# Allegro board PT8618.brd
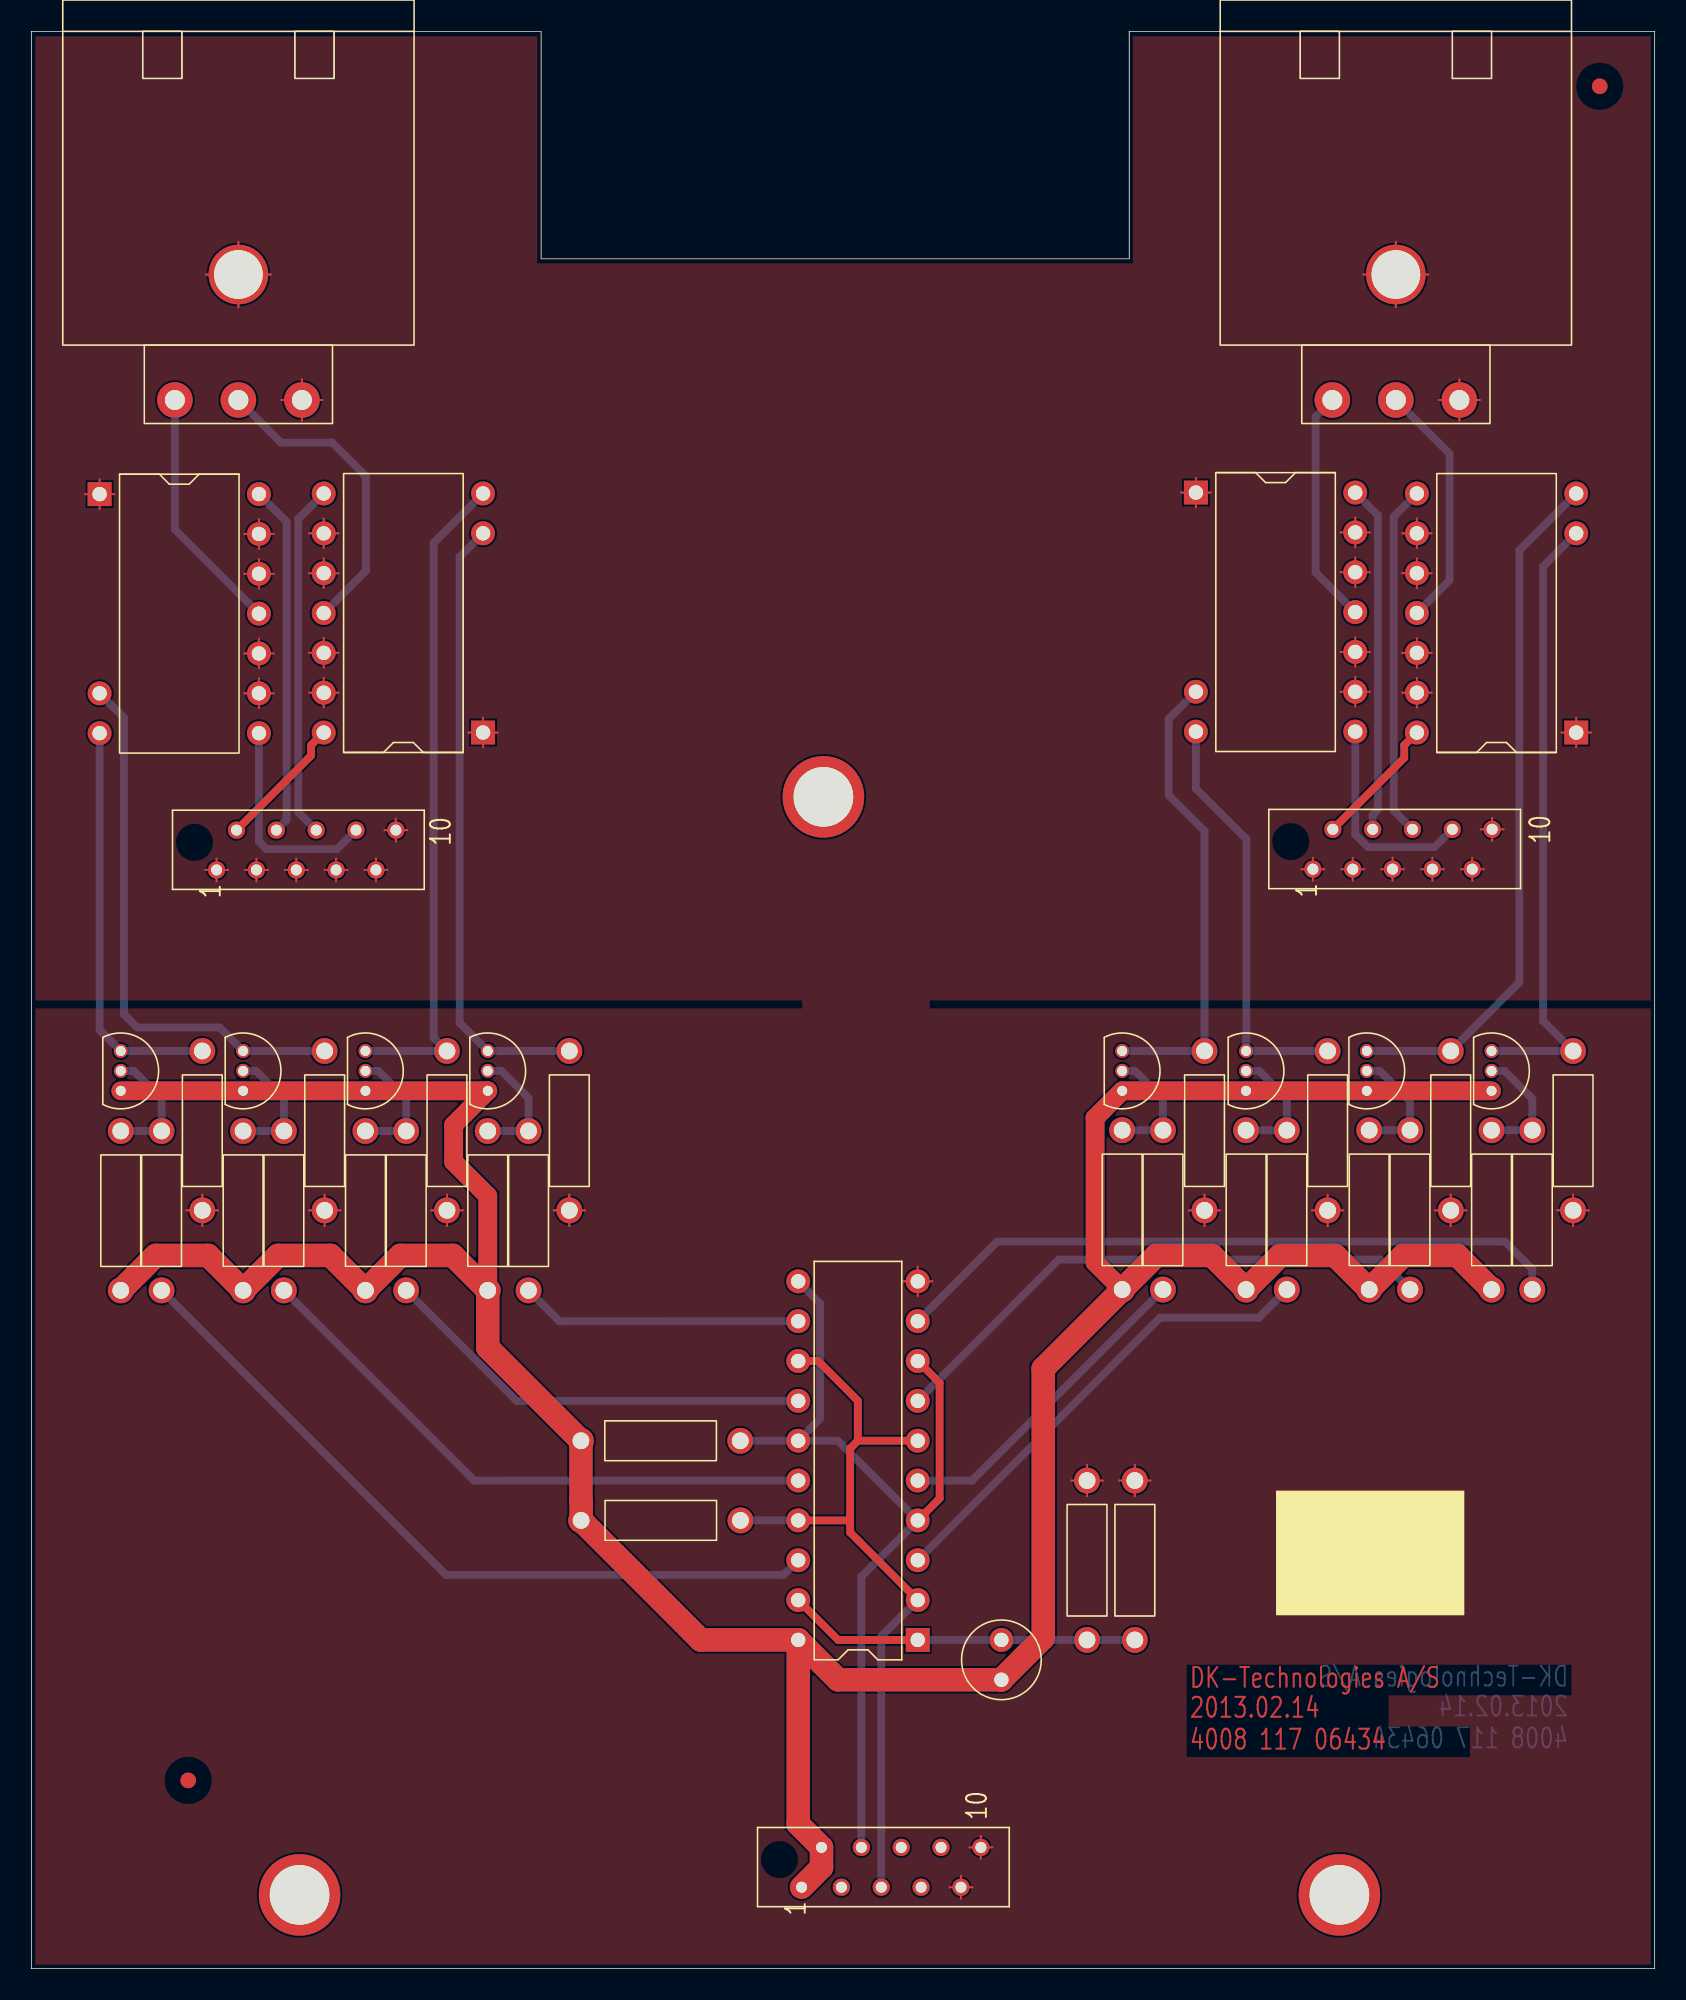
[diagram p0: board, top side]
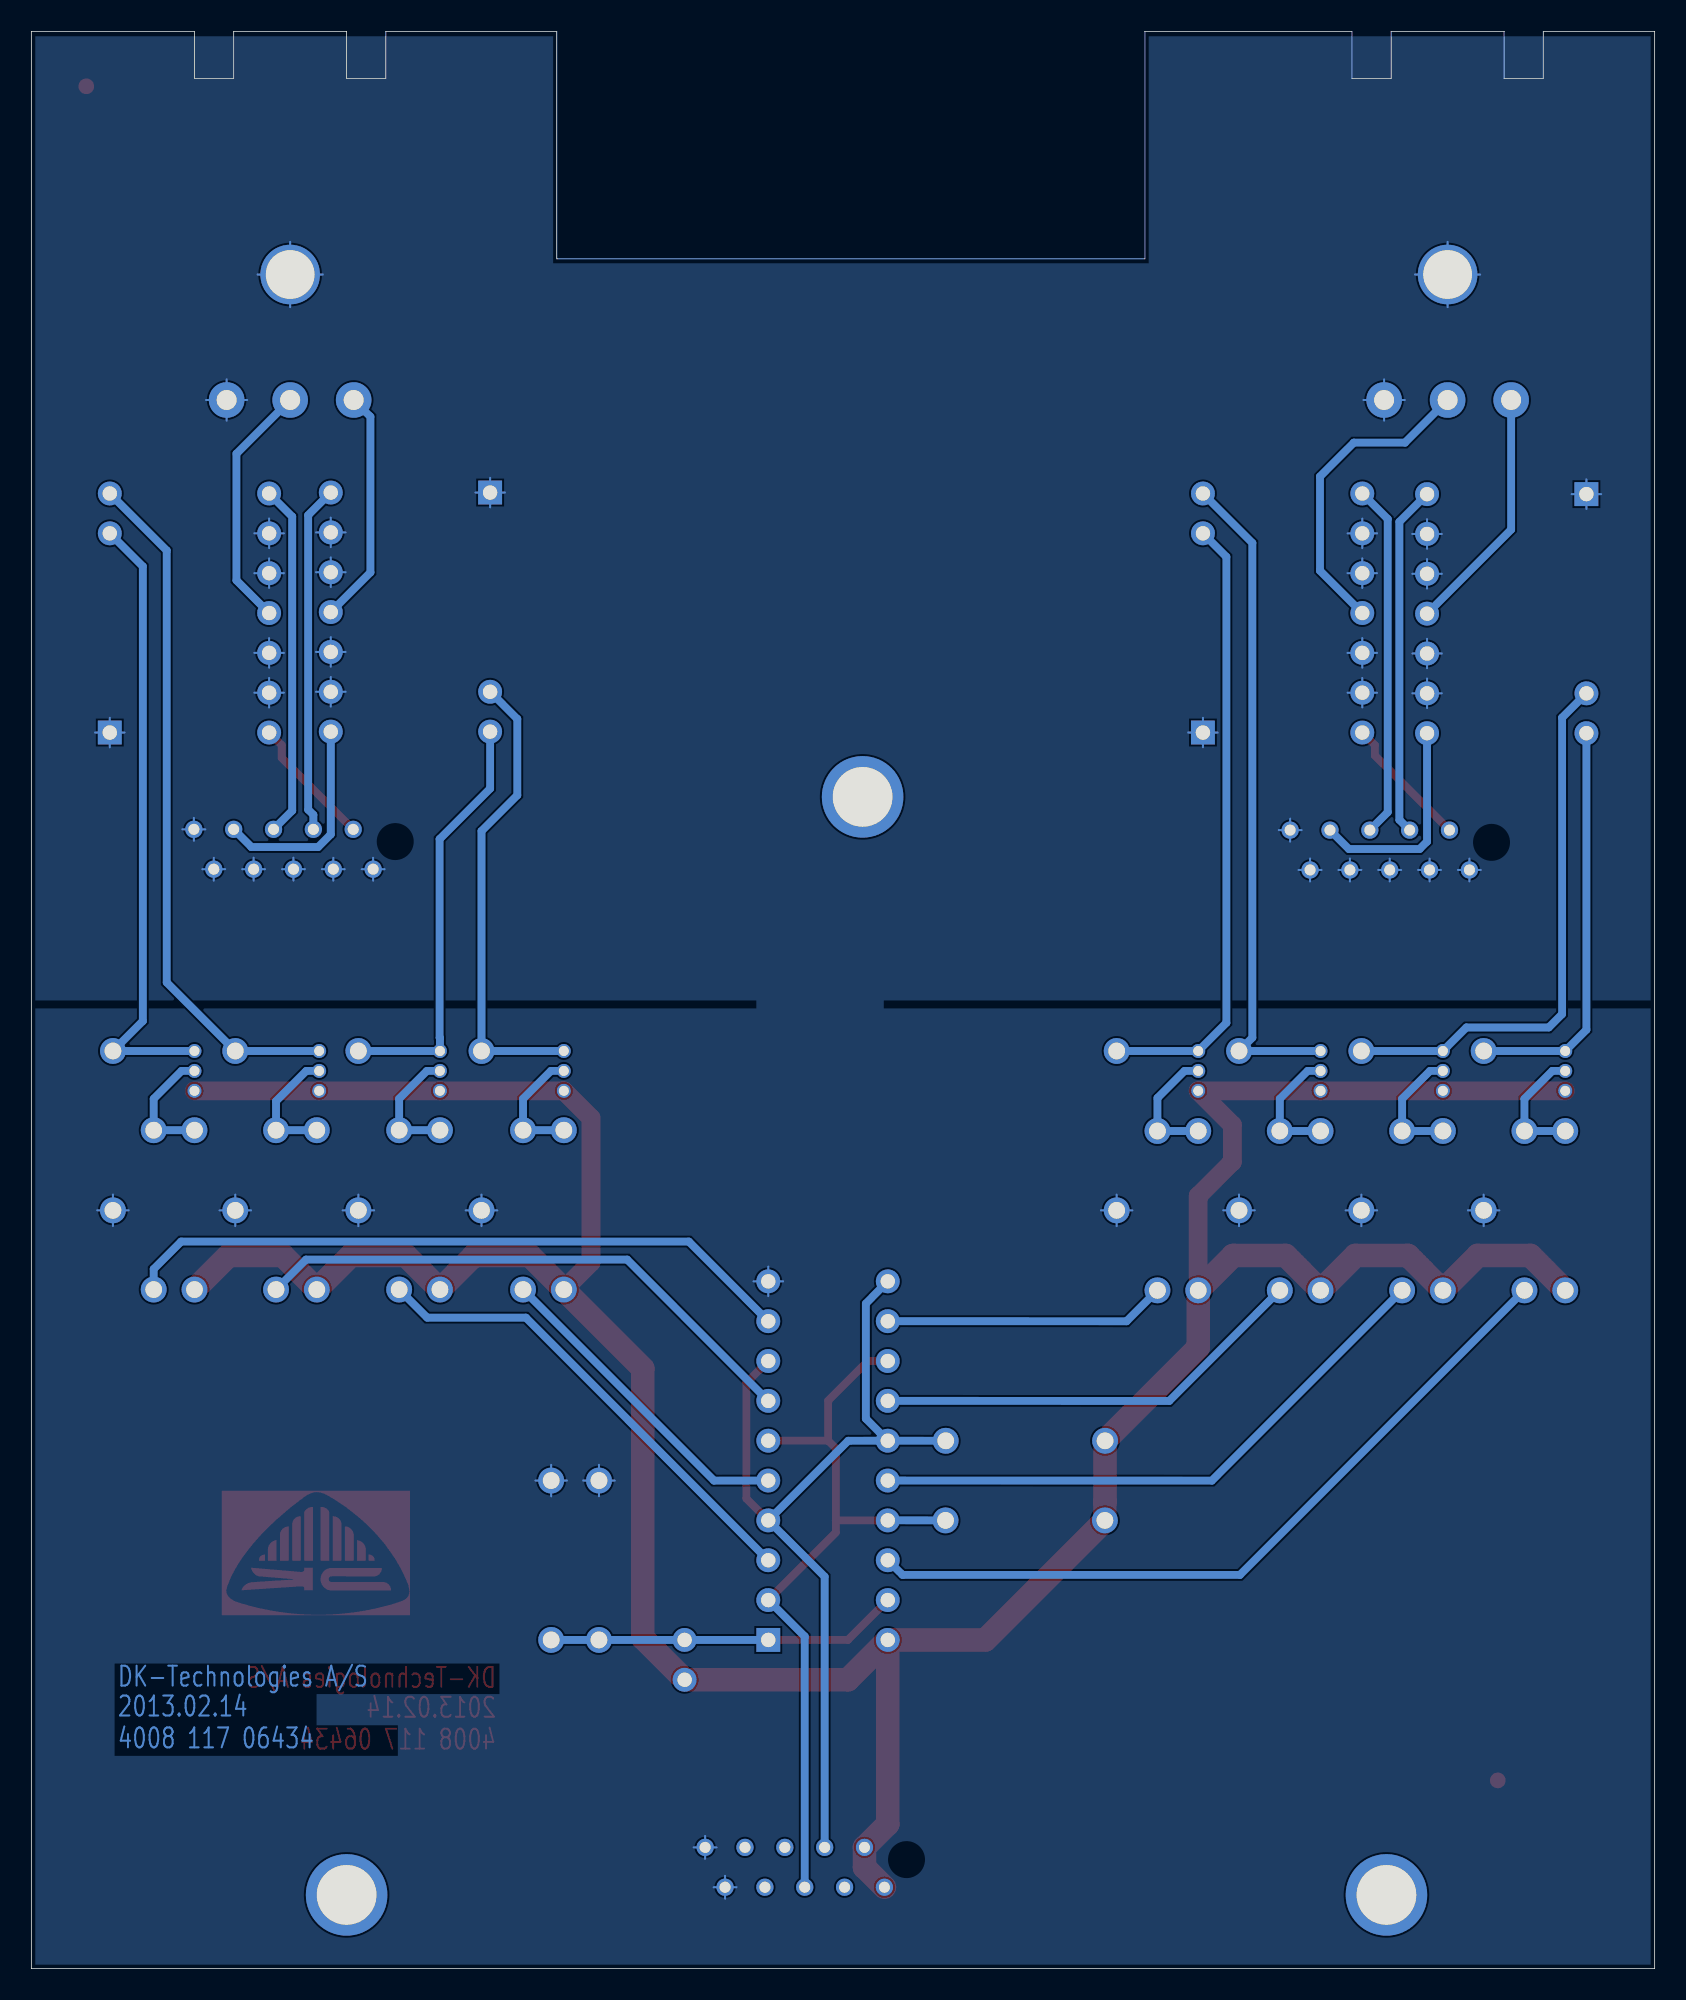
[diagram p1: board, bottom side, seen from below]

Outline 103.5 x 123.5 mm; copper layers: TOP, BOTTOM. Coordinates in mm from the lower left corner of the outline.
Outline path: 0,123.5 7.1,123.5 7.1,120.5 9.6,120.5 9.6,123.5 16.8,123.5 16.8,120.5 19.3,120.5 19.3,123.5 32.5,123.5 32.5,109 70,109 70,123.5 80.9,123.5 80.9,120.5 83.4,120.5 83.4,123.5 90.6,123.5 90.6,120.5 93.1,120.5 93.1,123.5 103.5,123.5 103.5,0 0,0 0,123.5

## Placement (name value [footprint] x y rotation side)
C401  10u/16V  [CAP196]  61.85 18.41 0 top
D401  BAW62  [RES400]  10.9 58.5 180 top
D402  BAW62  [RES400]  18.7 58.5 180 top
D403  BAW62  [RES400]  26.5 58.5 180 top
D404  BAW62  [RES400]  34.3 58.5 180 top
D405  BAW62  [RES400]  90.5 58.5 180 top
D406  BAW62  [RES400]  98.3 58.5 180 top
D407  BAW62  [RES400]  82.65 58.5 180 top
D408  BAW62  [RES400]  74.8 58.5 180 top
D409  BAT81  [RES400]  67.31 20.95 0 top
NOREF  -  [unnamed]  83.4 4.7 0 top
NOREF#2  -  [unnamed]  50.5 74.7 0 top
NOREF#3  -  [unnamed#2]  10 12 0 top
NOREF#4  -  [unnamed#2]  100 120 0 top
NOREF#5  -  [unnamed]  17.1 4.7 0 top
Q401  BC327  [TO92]  5.7 58.5 0 top
Q402  BC327  [TO92]  13.5 58.5 0 top
Q403  BC327  [TO92]  21.3 58.5 0 top
Q404  BC327  [TO92]  29.1 58.5 0 top
Q405  BC327  [TO92]  85.15 58.5 0 top
Q406  BC327  [TO92]  93.1 58.5 0 top
Q407  BC327  [TO92]  77.45 58.5 0 top
Q408  BC327  [TO92]  69.55 58.5 0 top
R401  2K67  [RES400]  8.3 53.4 180 top
R402  1K0  [RES400]  5.7 53.4 180 top
R403  2K67  [RES400]  16.1 53.4 180 top
R404  1K0  [RES400]  13.5 53.4 180 top
R405  2K67  [RES400]  23.9 53.4 180 top
R406  1K0  [RES400]  21.3 53.4 180 top
R407  2K67  [RES400]  31.7 53.4 180 top
R408  1K0  [RES400]  29.1 53.4 180 top
R409  2K67  [RES400]  87.9 53.45 180 top
R410  1K0  [RES400]  85.3 53.45 180 top
R411  2K67  [RES400]  95.7 53.45 180 top
R412  1K0  [RES400]  93.1 53.45 180 top
R413  2K67  [RES400]  80.05 53.45 180 top
R414  1K0  [RES400]  77.45 53.45 180 top
R415  2K67  [RES400]  72.15 53.45 180 top
R416  1K0  [RES400]  69.55 53.45 180 top
R417  10K0  [RES400]  70.36 31.11 180 top
R418  10K0  [RES400]  45.2 33.65 90 top
R419  10K0  [RES400]  45.21 28.57 90 top
RE401  RK1-L2-SV  [DIP14_4-RELAY]  4.35 94 0 top
RE402  RK1-L2-SV  [DIP14_4-RELAY]  28.8 78.8 180 top
RE403  RK1-L2-SV  [DIP14_4-RELAY]  74.25 94.1 0 top
RE404  RK1-L2-SV  [DIP14_4-RELAY]  98.5 78.8 180 top
U401  SN74HC244N  [DIP20_3]  56.52 20.95 180 top
UNK#REF  -  [#2]  85.3 26.5 0 top
XA4  CON10  [CONN_MICROMATCH_10]  33.4 67.5 90 top
XB4  CON4  [CONN_XLM-3-32PCV]  13.2 100 270 top
XC4  CON10  [CONN_MICROMATCH_10]  103.3 67.55 90 top
XD4  CON4  [CONN_XLM-3-32PCV]  87 100 270 top
XE4  CON10  [CONN_MICROMATCH_10]  70.7 2.65 90 top

## Library data of the parts
C401 = CAPACITOR POL_0: Tolerance: ***; User Part Number: ***
D401-D409 = DIODE_0: Tolerance: ***; User Part Number: ***
Q401-Q408 = PNP_0
R401-R419 = R_0: Tolerance: ***; User Part Number: ***
RE401-RE404 = RELAY SPDT_5: Tolerance: ***; User Part Number: ***
U401 = 74LVT244: Tolerance: ***; User Part Number: ***
XA4 XC4 XE4 = CON10
XB4 XD4 = CON4

## Footprints (pads in the part's own frame, mm; a bottom-side part is the same pattern mirrored in y, then rotated)
CAP196
  round 1.524 hole 0.914: 1(0,0) 2(0,2.54)
CONN_MICROMATCH_10
  round 0 hole 1.95 unplated: (4.3,23)
  round 1.1 hole 0.7: 1(2.54,21.59) 2(5.08,20.32) 3(2.54,19.05) 4(5.08,17.78) 5(2.54,16.51) 6(5.08,15.24) 7(2.54,13.97) 8(5.08,12.7) 9(2.54,11.43) 10(5.08,10.16)
CONN_XLM-3-32PCV
  round 2.27 hole 1.27: 1(0,4.05) 2(0,-4.05) 3(0,0)
  round 3.8 hole 3.1: 4(-8,0)
DIP14_4-RELAY
  rect 1.524x1.524 hole 0.914: 1(0,0)
  round 1.524 hole 0.914: 6(0,-12.7) 7(0,-15.24) 8(10.16,-15.24) 9(10.16,-12.7) 10(10.16,-10.16) 11(10.16,-7.62) 12(10.16,-5.08) 13(10.16,-2.54) 14(10.16,0)
DIP20_3
  rect 1.524x1.524 hole 0.914: 1(0,0)
  round 1.524 hole 0.914: 2(0,-2.54) 3(0,-5.08) 4(0,-7.62) 5(0,-10.16) 6(0,-12.7) 7(0,-15.24) 8(0,-17.78) 9(0,-20.32) 10(0,-22.86) 11(7.62,-22.86) 12(7.62,-20.32) 13(7.62,-17.78) 14(7.62,-15.24) 15(7.62,-12.7) 16(7.62,-10.16) 17(7.62,-7.62) 18(7.62,-5.08) 19(7.62,-2.54) 20(7.62,0)
RES400
  round 1.651 hole 1.067: 1(0,0) 2(0,10.16)
TO92
  round 0.889 hole 0.635: 1(0,0) 2(0,-1.27) 3(0,-2.54)
unnamed
  round 5.2 hole 3.8: (0,0)
unnamed#2
  round 1 smd: (0,0)

## Nets
+5V: C401.1 Q401.3(EMITTER) Q402.3(EMITTER) Q403.3(EMITTER) Q404.3(EMITTER) Q405.3(EMITTER) Q406.3(EMITTER) Q407.3(EMITTER) Q408.3(EMITTER) R402.2 R404.2 R406.2 R408.2 R410.2 R412.2 R414.2 R416.2 R418.2 R419.2 U401.20(VCC) XE4.1 XE4.2
GND_SIGNAL: D401.2 D402.2 D403.2 D404.2 D405.2 D406.2 D407.2 D408.2 D409.2 R417.1 RE401.1(C) RE401.9(C9) RE401.10(C10) RE401.12(C12) RE401.13(C13) RE402.1(C) RE402.9(C9) RE402.10(C10) RE402.12(C12) RE402.13(C13) RE403.1(C) RE403.9(C9) RE403.10(C10) RE403.12(C12) RE403.13(C13) RE404.1(C) RE404.9(C9) RE404.10(C10) RE404.12(C12) RE404.13(C13) U401.10(GND) XA4.1 XA4.3 XA4.5 XA4.7 XA4.9 XA4.10 XB4.1 XB4.4 XC4.1 XC4.3 XC4.5 XC4.7 XC4.9 XC4.10 XD4.1 XD4.4 XE4.9 XE4.10
RESET_REL: R419.1 U401.2(I0) U401.6(I2) U401.13(I6) U401.17(I4) XE4.5
SET_REL: R418.1 U401.4(I1) U401.8(I3) U401.11(I7) U401.15(I5) XE4.4
N01245: C401.2 D409.1 R417.2 U401.1(O\E\1\) U401.19(O\E\2\)
N02897: Q401.2(BASE) R401.1 R402.1
N03054: D401.1 Q401.1(COLLECTOR) RE401.7(SET)
N03551: Q402.2(BASE) R403.1 R404.1
N03575: D402.1 Q402.1(COLLECTOR) RE401.6(RESET)
N04126: Q403.2(BASE) R405.1 R406.1
N04150: D403.1 Q403.1(COLLECTOR) RE402.7(SET)
N04216: Q404.2(BASE) R407.1 R408.1
N04256: D404.1 Q404.1(COLLECTOR) RE402.6(RESET)
N04568: Q405.2(BASE) R409.1 R410.1
N04592: D405.1 Q405.1(COLLECTOR) RE404.7(SET)
N04658: Q406.2(BASE) R411.1 R412.1
N04698: D406.1 Q406.1(COLLECTOR) RE404.6(RESET)
N05603: Q407.2(BASE) R413.1 R414.1
N05627: D407.1 Q407.1(COLLECTOR) RE403.7(SET)
N05693: Q408.2(BASE) R415.1 R416.1
N05733: D408.1 Q408.1(COLLECTOR) RE403.6(RESET)
N06021: R401.2 U401.18(O0)
N06033: R403.2 U401.16(O1)
N06051: R405.2 U401.14(O2)
N06063: R407.2 U401.12(O3)
N06202: R413.2 U401.3(O4)
N06214: R415.2 U401.5(O5)
N06252: R409.2 U401.7(O6)
N06264: R411.2 U401.9(O7)
N07388: RE401.11(COMMON) XB4.2
N08121: RE402.11(COMMON) XB4.3
N13215: RE402.14(NC) XA4.2
N13219: RE402.8(NO) XA4.6
N13231: RE401.14(NC) XA4.4
N13243: RE401.8(NO) XA4.8
N13688: RE404.8(NO) XC4.6
N14649: RE404.14(NC) XC4.2
N14657: RE403.14(NC) XC4.4
N14661: RE403.8(NO) XC4.8
N15236: RE403.11(COMMON) XD4.2
N15633: RE404.11(COMMON) XD4.3

Pads without a net: XE4 3 6 7 8

## Routing (per net, layer and track width the routed paths; a pad name or vN(x,y) marks a point on that pad's centre or on a via; arc(x,y) is an arc through that point)
+5V: length 226.6
  TOP w1.2: Q406.3 Q405.3 Q407.3 Q408.3 67.82,54.23 67.82,45.02 R416.2 ; Q401.3 Q402.3 Q403.3 Q404.3 26.92,53.78 26.92,51.44 29.1,49.26 R408.2
  TOP w1.5: XE4.1 50.38,6.46 XE4.2 48.9,9.21 U401.20 ; U401.20 42.67,20.95 R419.2 35.05,29.78 35.04,29.79 R418.2 29.1,39.59 R408.2 26.87,45.47 23.53,45.47 R406.2 19.07,45.47 15.73,45.47 R404.2 11.27,45.47 7.93,45.47 R402.2 ; U401.20 51.44,18.41 C401.1 64.52,21.08 64.52,38.26 R416.2 71.73,45.47 75.27,45.47 R414.2 79.63,45.47 83.12,45.47 R410.2 87.48,45.47 90.92,45.47 R412.2
GND_SIGNAL: length 374
  TOP w0.127: XC4.7 89.33,70.82 ; XC4.7 90.06,70.09 ; XC4.7 88.6,70.09 ; XC4.7 89.33,69.36 ; 14.35,69.31 XA4.3 ; XA4.3 14.35,70.77 ; XA4.3 15.08,70.04 ; XA4.3 13.62,70.04 ; RE404.10 88.34,89.9 ; RE404.10 88.34,88.02 ; RE404.10 87.4,88.96 ; RE404.10 89.28,88.96 ; 87.4,91.5 RE404.9 ; RE404.9 88.34,92.44 ; RE404.9 89.28,91.5 ; RE404.9 88.34,90.56 ; XA4.10 23.97,72.58 ; XA4.10 23.24,71.85 ; XA4.10 23.24,73.31 ; XA4.10 22.51,72.58 ; XA4.1 12.54,70.04 ; XA4.1 11.81,69.31 ; XA4.1 11.08,70.04 ; XA4.1 11.81,70.77 ; 87.4,83.88 RE404.12 ; RE404.12 88.34,82.94 ; RE404.12 89.28,83.88 ; RE404.12 88.34,84.82 ; RE402.9 19.58,91.5 ; RE402.9 18.64,90.56 ; RE402.9 18.64,92.44 ; RE402.9 17.7,91.5 ; RE403.10 85.35,83.94 ; RE403.10 84.41,84.88 ; RE403.10 84.41,83 ; RE403.10 83.47,83.94 ; RE402.10 18.64,89.9 ; RE402.10 19.58,88.96 ; RE402.10 18.64,88.02 ; RE402.10 17.7,88.96 ; 84.41,80.46 RE403.9 ; RE403.9 84.41,82.34 ; RE403.9 83.47,81.4 ; RE403.9 85.35,81.4 ; RE402.1 28.8,79.74 ; RE402.1 29.74,78.8 ; RE402.1 28.8,77.86 ; RE402.1 27.86,78.8 ; 13.57,83.84 RE401.10 ; RE401.10 14.51,82.9 ; RE401.10 15.45,83.84 ; RE401.10 14.51,84.78 ; XC4.5 86.79,70.82 ; XC4.5 87.52,70.09 ; XC4.5 86.79,69.36 ; XC4.5 86.06,70.09 ; 56.52,42.88 U401.10 ; U401.10 55.58,43.81 ; U401.10 56.52,44.76 ; U401.10 57.45,43.81 ; XB4.4 15.28,108 ; XB4.4 11.12,108 ; XB4.4 13.2,110.08 ; XB4.4 13.2,105.92 ; 81.65,48.34 D407.2 ; D407.2 82.65,47.34 ; D407.2 83.65,48.34 ; D407.2 82.65,49.34 ; RE402.13 18.64,82.28 ; RE402.13 17.7,81.34 ; RE402.13 19.58,81.34 ; RE402.13 18.64,80.4 ; D404.2 34.3,49.34 ; D404.2 35.3,48.34 ; D404.2 33.3,48.34 ; D404.2 34.3,47.34 ; XA4.5 17.62,70.04 ; XA4.5 16.16,70.04 ; XA4.5 16.89,70.77 ; XA4.5 16.89,69.31 ; 97.56,78.8 RE404.1 ; RE404.1 98.5,77.86 ; RE404.1 98.5,79.74 ; RE404.1 99.44,78.8 ; RE401.12 15.45,88.92 ; RE401.12 14.51,87.98 ; RE401.12 13.57,88.92 ; RE401.12 14.51,89.86 ; 14.51,90.52 RE401.13 ; RE401.13 15.45,91.46 ; RE401.13 14.51,92.4 ; RE401.13 13.57,91.46 ; 87,105.92 XD4.4 ; XD4.4 89.08,108 ; XD4.4 84.92,108 ; XD4.4 87,110.08 ; RE403.13 84.41,92.5 ; RE403.13 85.35,91.56 ; RE403.13 84.41,90.62 ; RE403.13 83.47,91.56 ; D405.2 90.5,49.34 ; D405.2 90.5,47.34 ; D405.2 91.5,48.34 ; D405.2 89.5,48.34 ; D403.2 27.5,48.34 ; D403.2 26.5,49.34 ; D403.2 25.5,48.34 ; D403.2 26.5,47.34 ; D406.2 99.3,48.34 ; D406.2 98.3,47.34 ; D406.2 98.3,49.34 ; D406.2 97.3,48.34 ; 69.35,31.11 R417.1 ; R417.1 70.36,30.11 ; R417.1 70.36,32.12 ; R417.1 71.36,31.11 ; XD4.1 91.05,101.31 ; XD4.1 89.74,100 ; XD4.1 91.05,98.69 ; XD4.1 92.36,100 ; 18.7,47.34 D402.2 ; D402.2 18.7,49.34 ; D402.2 19.7,48.34 ; D402.2 17.7,48.34 ; RE402.12 18.64,84.82 ; RE402.12 19.58,83.88 ; RE402.12 17.7,83.88 ; RE402.12 18.64,82.94 ; 19.43,69.31 XA4.7 ; XA4.7 20.16,70.04 ; XA4.7 19.43,70.77 ; XA4.7 18.7,70.04 ; XC4.9 92.6,70.09 ; XC4.9 91.87,69.36 ; XC4.9 91.87,70.82 ; XC4.9 91.14,70.09 ; RE401.1 4.35,94.94 ; RE401.1 4.35,93.06 ; RE401.1 3.41,94 ; RE401.1 5.29,94 ; 21.24,70.04 XA4.9 ; XA4.9 21.97,70.77 ; XA4.9 22.7,70.04 ; XA4.9 21.97,69.31 ; XC4.1 81.71,70.82 ; XC4.1 81.71,69.36 ; XC4.1 82.44,70.09 ; XC4.1 80.98,70.09 ; XC4.3 84.98,70.09 ; XC4.3 84.25,70.82 ; XC4.3 83.52,70.09 ; XC4.3 84.25,69.36 ; D401.2 10.9,49.34 ; D401.2 10.9,47.34 ; D401.2 11.9,48.34 ; D401.2 9.9,48.34 ; 73.8,48.34 D408.2 ; D408.2 74.8,47.34 ; D408.2 75.8,48.34 ; D408.2 74.8,49.34 ; 13.57,81.3 RE401.9 ; RE401.9 14.51,80.36 ; RE401.9 14.51,82.24 ; RE401.9 15.45,81.3 ; 73.31,94.1 RE403.1 ; RE403.1 75.19,94.1 ; RE403.1 74.25,93.16 ; RE403.1 74.25,95.04 ; 84.41,88.08 RE403.12 ; RE403.12 83.47,89.02 ; RE403.12 84.41,89.96 ; RE403.12 85.35,89.02 ; 59.81,7.73 XE4.10 ; XE4.10 60.54,7 ; XE4.10 61.27,7.73 ; XE4.10 60.54,8.46 ; XB4.1 18.56,100 ; XB4.1 17.25,98.69 ; XB4.1 15.94,100 ; XB4.1 17.25,101.31 ; 59.27,4.46 XE4.9 ; XE4.9 60,5.19 ; XE4.9 59.27,5.92 ; XE4.9 58.54,5.19 ; D409.2 67.31,32.12 ; D409.2 66.31,31.11 ; D409.2 67.31,30.11 ; D409.2 68.31,31.11 ; 92.41,72.63 XC4.10 ; XC4.10 93.14,71.9 ; XC4.10 93.87,72.63 ; XC4.10 93.14,73.36 ; 88.34,80.4 RE404.13 ; RE404.13 89.28,81.34 ; RE404.13 88.34,82.28 ; RE404.13 87.4,81.34
  BOTTOM w0.127: RE403.10 85.35,83.94 ; RE403.10 84.41,84.88 ; RE403.10 84.41,83 ; RE403.10 83.47,83.94 ; 13.57,91.46 RE401.13 ; RE401.13 14.51,90.52 ; RE401.13 14.51,92.4 ; RE401.13 15.45,91.46 ; XB4.4 13.2,110.08 ; XB4.4 15.28,108 ; XB4.4 13.2,105.92 ; XB4.4 11.12,108 ; 14.51,82.9 RE401.10 ; RE401.10 15.45,83.84 ; RE401.10 14.51,84.78 ; RE401.10 13.57,83.84 ; 17.25,98.69 XB4.1 ; XB4.1 18.56,100 ; XB4.1 15.94,100 ; XB4.1 17.25,101.31 ; 98.5,77.86 RE404.1 ; RE404.1 98.5,79.74 ; RE404.1 97.56,78.8 ; RE404.1 99.44,78.8 ; 88.34,82.94 RE404.12 ; RE404.12 88.34,84.82 ; RE404.12 87.4,83.88 ; RE404.12 89.28,83.88 ; XC4.9 92.6,70.09 ; XC4.9 91.14,70.09 ; XC4.9 91.87,69.36 ; XC4.9 91.87,70.82 ; RE401.9 15.45,81.3 ; RE401.9 13.57,81.3 ; RE401.9 14.51,82.24 ; RE401.9 14.51,80.36 ; 84.41,90.62 RE403.13 ; RE403.13 85.35,91.56 ; RE403.13 83.47,91.56 ; RE403.13 84.41,92.5 ; XA4.7 19.43,70.77 ; XA4.7 18.7,70.04 ; XA4.7 20.16,70.04 ; XA4.7 19.43,69.31 ; D405.2 90.5,49.34 ; D405.2 91.5,48.34 ; D405.2 90.5,47.34 ; D405.2 89.5,48.34 ; RE402.12 19.58,83.88 ; RE402.12 18.64,84.82 ; RE402.12 17.7,83.88 ; RE402.12 18.64,82.94 ; 59.27,4.46 XE4.9 ; XE4.9 59.27,5.92 ; XE4.9 60,5.19 ; XE4.9 58.54,5.19 ; XD4.1 92.36,100 ; XD4.1 91.05,98.69 ; XD4.1 91.05,101.31 ; XD4.1 89.74,100 ; 18.64,88.02 RE402.10 ; RE402.10 17.7,88.96 ; RE402.10 19.58,88.96 ; RE402.10 18.64,89.9 ; 70.36,30.11 R417.1 ; R417.1 69.35,31.11 ; R417.1 70.36,32.12 ; R417.1 71.36,31.11 ; 83.47,81.4 RE403.9 ; RE403.9 85.35,81.4 ; RE403.9 84.41,82.34 ; RE403.9 84.41,80.46 ; D402.2 19.7,48.34 ; D402.2 18.7,47.34 ; D402.2 17.7,48.34 ; D402.2 18.7,49.34 ; 59.81,7.73 XE4.10 ; XE4.10 61.27,7.73 ; XE4.10 60.54,8.46 ; XE4.10 60.54,7 ; 21.97,69.31 XA4.9 ; XA4.9 21.97,70.77 ; XA4.9 22.7,70.04 ; XA4.9 21.24,70.04 ; 74.8,47.34 D408.2 ; D408.2 73.8,48.34 ; D408.2 74.8,49.34 ; D408.2 75.8,48.34 ; D407.2 82.65,49.34 ; D407.2 82.65,47.34 ; D407.2 83.65,48.34 ; D407.2 81.65,48.34 ; 56.52,42.88 U401.10 ; U401.10 56.52,44.76 ; U401.10 55.58,43.81 ; U401.10 57.45,43.81 ; 86.79,69.36 XC4.5 ; XC4.5 86.06,70.09 ; XC4.5 86.79,70.82 ; XC4.5 87.52,70.09 ; 17.7,91.5 RE402.9 ; RE402.9 18.64,90.56 ; RE402.9 18.64,92.44 ; RE402.9 19.58,91.5 ; 4.35,93.06 RE401.1 ; RE401.1 3.41,94 ; RE401.1 4.35,94.94 ; RE401.1 5.29,94 ; D404.2 34.3,49.34 ; D404.2 35.3,48.34 ; D404.2 33.3,48.34 ; D404.2 34.3,47.34 ; 66.31,31.11 D409.2 ; D409.2 67.31,32.12 ; D409.2 67.31,30.11 ; D409.2 68.31,31.11 ; 16.16,70.04 XA4.5 ; XA4.5 16.89,69.31 ; XA4.5 17.62,70.04 ; XA4.5 16.89,70.77 ; RE402.13 19.58,81.34 ; RE402.13 18.64,80.4 ; RE402.13 17.7,81.34 ; RE402.13 18.64,82.28 ; XC4.10 93.14,73.36 ; XC4.10 92.41,72.63 ; XC4.10 93.87,72.63 ; XC4.10 93.14,71.9 ; XA4.3 14.35,70.77 ; XA4.3 15.08,70.04 ; XA4.3 14.35,69.31 ; XA4.3 13.62,70.04 ; D406.2 98.3,49.34 ; D406.2 98.3,47.34 ; D406.2 97.3,48.34 ; D406.2 99.3,48.34 ; XC4.7 89.33,70.82 ; XC4.7 90.06,70.09 ; XC4.7 89.33,69.36 ; XC4.7 88.6,70.09 ; 87,105.92 XD4.4 ; XD4.4 89.08,108 ; XD4.4 87,110.08 ; XD4.4 84.92,108 ; XC4.1 81.71,70.82 ; XC4.1 82.44,70.09 ; XC4.1 81.71,69.36 ; XC4.1 80.98,70.09 ; 84.25,69.36 XC4.3 ; XC4.3 83.52,70.09 ; XC4.3 84.25,70.82 ; XC4.3 84.98,70.09 ; D403.2 26.5,49.34 ; D403.2 25.5,48.34 ; D403.2 26.5,47.34 ; D403.2 27.5,48.34 ; 22.51,72.58 XA4.10 ; XA4.10 23.24,71.85 ; XA4.10 23.97,72.58 ; XA4.10 23.24,73.31 ; D401.2 11.9,48.34 ; D401.2 10.9,49.34 ; D401.2 10.9,47.34 ; D401.2 9.9,48.34 ; RE404.10 88.34,89.9 ; RE404.10 88.34,88.02 ; RE404.10 87.4,88.96 ; RE404.10 89.28,88.96 ; RE403.12 84.41,89.96 ; RE403.12 84.41,88.08 ; RE403.12 83.47,89.02 ; RE403.12 85.35,89.02 ; 11.08,70.04 XA4.1 ; XA4.1 11.81,70.77 ; XA4.1 11.81,69.31 ; XA4.1 12.54,70.04 ; RE403.1 75.19,94.1 ; RE403.1 73.31,94.1 ; RE403.1 74.25,95.04 ; RE403.1 74.25,93.16 ; RE404.9 88.34,92.44 ; RE404.9 87.4,91.5 ; RE404.9 89.28,91.5 ; RE404.9 88.34,90.56 ; RE401.12 14.51,89.86 ; RE401.12 15.45,88.92 ; RE401.12 13.57,88.92 ; RE401.12 14.51,87.98 ; 27.86,78.8 RE402.1 ; RE402.1 29.74,78.8 ; RE402.1 28.8,77.86 ; RE402.1 28.8,79.74 ; RE404.13 89.28,81.34 ; RE404.13 87.4,81.34 ; RE404.13 88.34,80.4 ; RE404.13 88.34,82.28
RESET_REL: length 49.6
  TOP w0.5: 56.52,23.5 52.2,27.8 52.2,28.57 ; 52.2,28.57 U401.17 ; 52.2,28.57 52.2,33.16 52.7,33.66 ; 52.7,33.66 52.7,36.2 50.16,38.73 U401.13 ; 52.7,33.66 U401.6
  BOTTOM w0.5: XE4.5 54.19,21.18 56.52,23.5 ; R419.1 48.89,28.58 U401.17
SET_REL: length 58.4
  TOP w0.5: U401.8 57.91,37.34 57.91,29.97 U401.4
  BOTTOM w0.5: U401.15 50.29,35.06 50.29,42.4 U401.11 ; U401.15 R418.1 ; U401.15 51.42,33.65 U401.4 52.92,24.99 XE4.4
N01245: length 22.5
  TOP w0.5: 48.9,23.5 51.44,20.95 U401.1
  BOTTOM w0.5: U401.1 C401.2 D409.1 R417.2
N02897: length 8
  BOTTOM w0.5: Q401.2 6.52,57.23 8.3,55.45 R401.1 R402.1
N03054: length 26
  BOTTOM w0.5: RE401.7 4.35,59.85 Q401.1 D401.1
N03551: length 8
  BOTTOM w0.5: Q402.2 14.32,57.23 16.1,55.45 R403.1 R404.1
N03575: length 34.9
  BOTTOM w0.5: D402.1 Q402.1 12,60 6.75,60 5.9,60.85 5.9,79.75 RE401.6
N04126: length 8
  BOTTOM w0.5: R406.1 R405.1 23.9,55.45 22.12,57.23 Q403.2
N04150: length 42.4
  BOTTOM w0.5: RE402.7 25.65,90.89 25.65,59.35 D403.1 Q403.1
N04216: length 8
  BOTTOM w0.5: R408.1 R407.1 31.7,55.5 29.97,57.23 Q404.2
N04256: length 39.6
  BOTTOM w0.5: D404.1 Q404.1 27.3,60.3 27.3,90 RE402.6
N04568: length 8
  BOTTOM w0.5: Q405.2 85.97,57.23 87.9,55.3 R409.1 R410.1
N04592: length 44.2
  BOTTOM w0.5: Q405.1 D405.1 94.87,62.87 94.87,90.41 RE404.7
N04658: length 7.9
  BOTTOM w0.5: R412.1 R411.1 95.7,55.45 93.92,57.23 Q406.2
N04698: length 39.9
  BOTTOM w0.5: RE404.6 96.39,89.39 96.39,60.41 D406.1 Q406.1
N05603: length 7.9
  BOTTOM w0.5: Q407.2 78.28,57.23 80.05,55.46 R413.1 R414.1
N05627: length 26.9
  BOTTOM w0.5: D407.1 Q407.1 77.45,59.32 77.47,59.34 77.47,72.01 74.25,75.23 RE403.7
N05693: length 7.9
  BOTTOM w0.5: Q408.2 70.37,57.23 72.15,55.45 R415.1 R416.1
N05733: length 29.8
  BOTTOM w0.5: Q408.1 D408.1 74.8,72.52 72.52,74.8 72.52,79.67 RE403.6
N06021: length 48.5
  BOTTOM w0.5: R401.2 26.44,25.1 47.95,25.1 48.9,26.04
N06033: length 37.8
  BOTTOM w0.5: U401.16 28.23,31.11 R403.2
N06051: length 27.9
  BOTTOM w0.5: U401.14 30.95,36.19 R405.2
N06063: length 18
  BOTTOM w0.5: U401.12 33.67,41.27 R407.2
N06202: length 30.7
  BOTTOM w0.5: R413.2 78.26,41.5 71.97,41.5 56.52,26.04
N06214: length 20.7
  BOTTOM w0.5: R415.2 59.97,31.11 U401.5
N06252: length 35.9
  BOTTOM w0.5: R409.2 85.99,45.2 65.51,45.2 U401.7
N06264: length 43.3
  BOTTOM w0.5: U401.9 61.58,46.35 93.95,46.35 95.7,44.6 R411.2
N07388: length 15.8
  BOTTOM w0.5: RE401.11 9.15,91.74 XB4.2
N08121: length 20
  BOTTOM w0.5: RE402.11 21.34,89.12 21.34,95.12 19.18,97.28 15.92,97.28 XB4.3
N13215: length 8.5
  TOP w0.5: RE402.14 17.83,77.99 17.83,77.33 XA4.2
N13219: length 22.6
  BOTTOM w0.5: RE402.8 17.02,92.42 17.02,73.72 XA4.6
N13231: length 22.4
  BOTTOM w0.5: RE401.14 16.28,92.23 16.28,73.24 XA4.4
N13243: length 13.8
  BOTTOM w0.5: RE401.8 14.51,71.85 14.99,71.37 19.49,71.37 XA4.8
N13688: length 22.5
  BOTTOM w0.5: XC4.6 86.87,73.82 86.87,92.57 RE404.8
N14649: length 8.4
  TOP w0.5: RE404.14 87.53,77.99 87.53,77.18 XC4.2
N14657: length 22.2
  BOTTOM w0.5: RE403.14 85.85,92.66 85.85,73.89 85.52,73.56 XC4.4
N14661: length 13.5
  BOTTOM w0.5: XC4.8 89.47,71.5 85.22,71.5 84.41,72.31 RE403.8
N15236: length 15
  BOTTOM w0.5: RE403.11 81.88,89.01 81.88,98.93 XD4.2
N15633: length 15.9
  BOTTOM w0.5: RE404.11 90.42,88.5 90.42,96.58 XD4.3

## Copper pours and planes (outline as drawn; the poured copper is in the pictures)
GND_SIGNAL on TOP (solid shape): 86.1,25.45 86.13,25.35 86.22,25.29 86.33,25.29 89.49,25.56 89.33,25.21 89,25.01 86.9,24.84 86.81,24.83 86.8,24.82 86.81,24.81 86.87,24.8 89.48,24.63 89.86,24.47 90.1,24.12 86.31,24.37 86.22,24.36 86.13,24.32 86.1,24.23 86.1,24.12 85.56,24.12 85.56,25.56 86.1,25.56
GND_SIGNAL on TOP (solid shape): 91.36,22.53 79.36,22.53 79.36,24.03 79.4,24.03 79.42,23.88 79.47,23.75 79.54,23.65 79.7,23.52 79.83,23.46 80.02,23.39 80.18,23.33 80.36,23.28 80.71,23.17 81.07,23.08 81.43,22.99 81.79,22.91 82.15,22.84 82.52,22.78 82.88,22.72 83.25,22.67 83.62,22.64 83.99,22.6 84.35,22.58 84.72,22.57 85.09,22.56 85.46,22.56 85.83,22.57 86.2,22.59 86.57,22.61 86.94,22.65 87.31,22.69 87.67,22.74 88.04,22.8 88.4,22.86 88.76,22.94 89.12,23.02 89.48,23.11 89.84,23.21 90.19,23.31 90.37,23.37 90.55,23.44 90.78,23.57 90.92,23.7 91.01,23.84 91.06,23.98 91.07,24.11 91.03,24.31 91.02,24.34 90.89,24.67 90.77,24.96 90.58,25.33 90.38,25.68 90.17,26.01 89.91,26.38 89.64,26.74 89.36,27.09 89.14,27.34 88.95,27.55 88.72,27.8 88.46,28.06 88.11,28.4 87.92,28.58 87.47,28.97 87.11,29.28 86.8,29.53 86.37,29.86 86.09,30.07 85.92,30.19 85.69,30.3 85.47,30.36 85.3,30.38 85.13,30.36 84.86,30.29 84.66,30.19 84.28,29.97 83.72,29.61 83.38,29.37 83.04,29.11 82.52,28.68 82.13,28.33 81.63,27.83 81.33,27.49 80.94,27.03 80.65,26.62 80.35,26.2 80.18,25.91 80.05,25.69 80,25.6 79.89,25.39 79.64,24.87 79.47,24.46 79.42,24.22 79.4,24.03 79.36,24.03 79.36,30.47 91.36,30.47
GND_SIGNAL on TOP: 0.25,0.25 0.25,61.21 49.15,61.21 49.15,61.72 0.25,61.72 0.25,123.19 32.26,123.19 32.26,108.71 70.23,108.71 70.23,123.19 103.25,123.19 103.25,61.72 57.28,61.72 57.28,61.21 103.25,61.21 103.25,0.25
GND_SIGNAL on BOTTOM: 0.25,0.25 0.25,61.21 49.15,61.21 49.15,61.72 0.25,61.72 0.25,123.19 32.26,123.19 32.26,108.71 70.23,108.71 70.23,123.19 103.25,123.19 103.25,61.72 57.28,61.72 57.28,61.21 103.25,61.21 103.25,0.25
GND_SIGNAL on TOP (solid shape): 84.5,29.1 84.73,29.36 85.06,29.43 85.06,26.01 85.03,26 84.5,26
GND_SIGNAL on TOP (solid shape): 85.54,29.43 85.87,29.36 86.1,29.1 86.1,26 85.57,26 85.54,26.01
GND_SIGNAL on TOP (solid shape): 83.51,26.01 83.49,26 82.95,26 82.95,27.7 83.14,28.05 83.51,28.19
GND_SIGNAL on TOP (solid shape): 83.73,28.4 83.92,28.72 84.28,28.84 84.28,26.01 84.26,26 83.73,26
GND_SIGNAL on TOP (solid shape): 86.32,28.84 86.68,28.72 86.87,28.4 86.87,26 86.34,26 86.32,26.01
GND_SIGNAL on TOP (solid shape): 87.09,28.19 87.46,28.05 87.65,27.7 87.65,26 87.11,26 87.09,26.01
GND_SIGNAL on TOP (solid shape): 84.47,25.54 85.06,24.82 84.47,24.11 80.56,24.11 80.72,24.5 81.11,24.65 84.41,24.65 84.54,24.82 84.42,25 84.29,25.01 81.89,25 81.69,25 81.31,25.15 81.16,25.54

Small or netless copper shapes (teardrops, artwork), in the pictures only: 4 on TOP

## Text on the board
BOTTOM: DK-Technologies A/S | 2013.02.14 | 4008 117 06434
TOP: DK-Technologies A/S | 2013.02.14 | 4008 117 06434
Ref Des/Assembly Top: DK-Technologies A/S | 2013.02.14 | 4008 117 06434
DIMENSION: 7.1 | 7.2 | 3.0 | 10.4 | 2.5 | 123.5 | 32.5 | 103.5 | 14.5
COMPVAL_TYPE_TOP: DK-Technologies A/S | 2013.02.14 | 4008 117 06434
